# Altium PCB PCB v0.1.PcbDoc
Units mm, origin at the board's own origin, x right, y up, seen from the top; angles counter-clockwise.
Board outline 12.97 x 23.85 mm, 8 copper layers (Top, GND Top, Signal 1, Signal 2/GND, Power, Signal 3, GND Bottom, Bottom), stack 1.211 mm thick; 53 components, 44 nets, 246 pads, 133 vias.
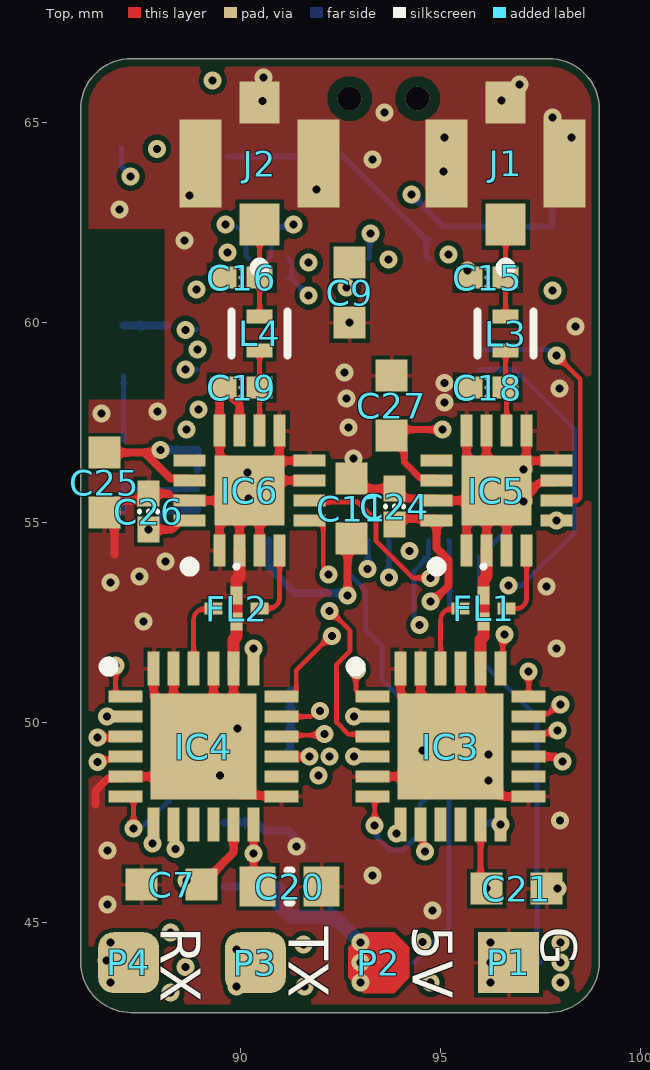
[diagram p0: Top view]
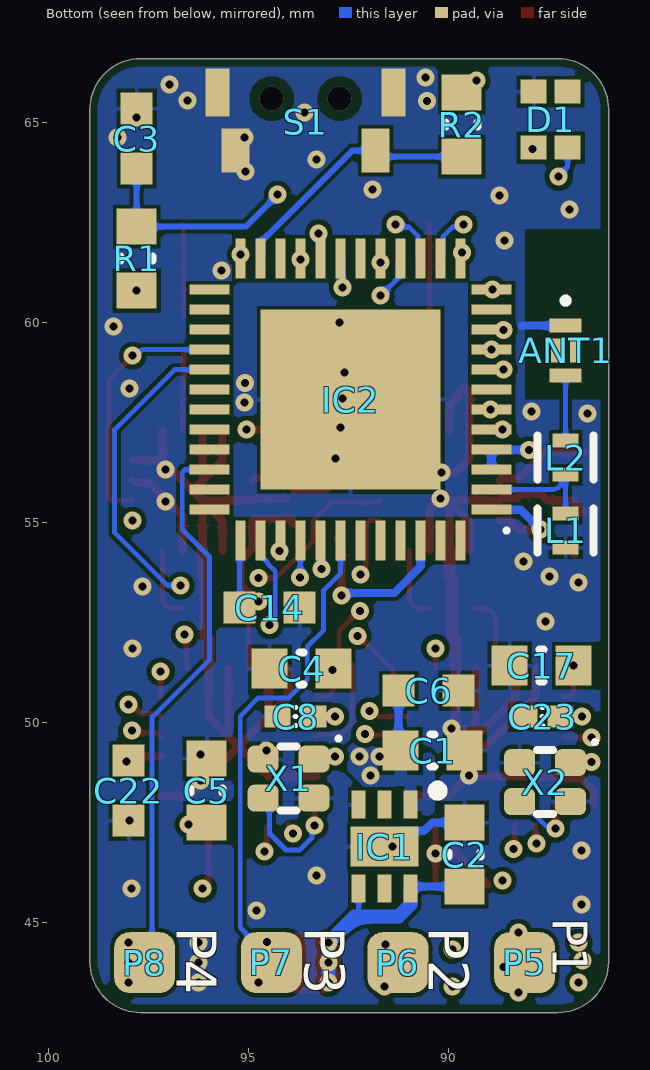
[diagram p1: Bottom view, seen from below]
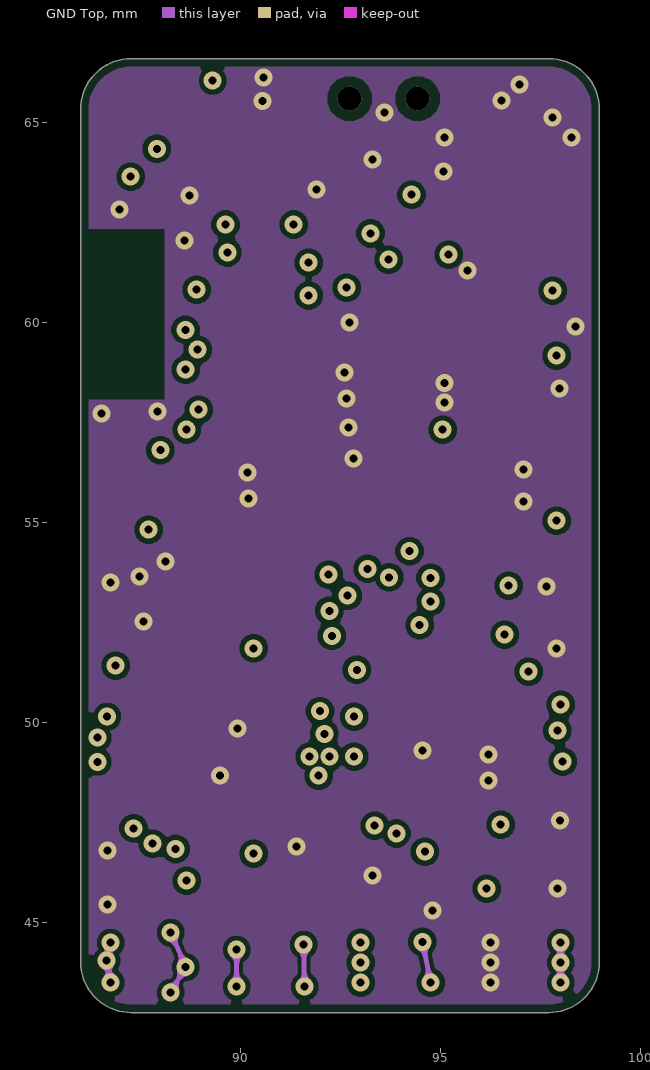
[diagram p2: GND Top]
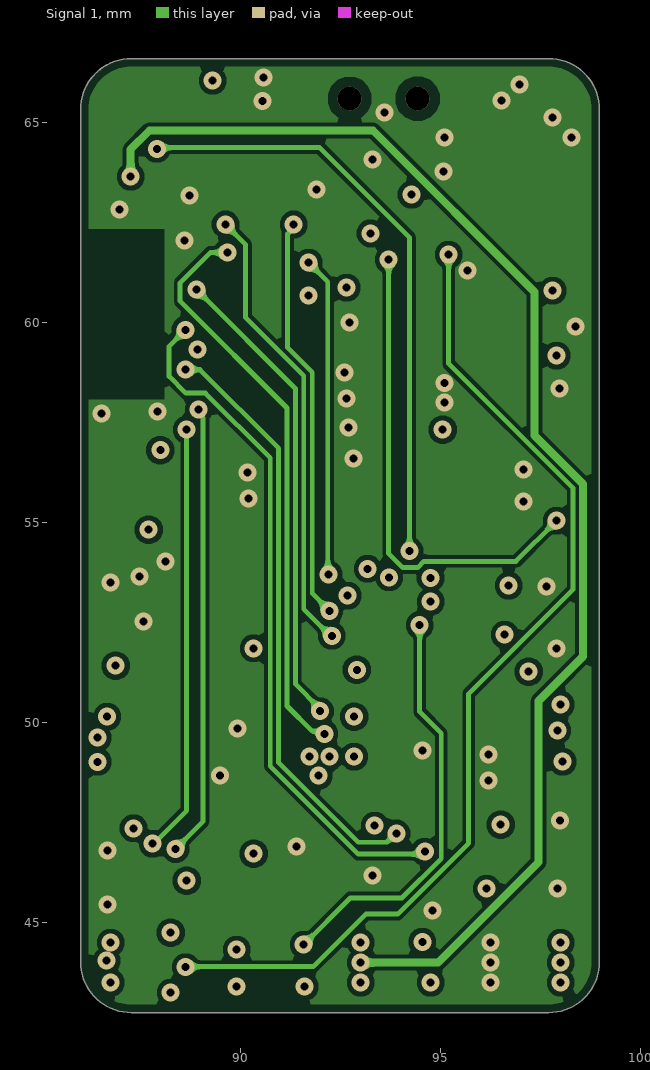
[diagram p3: Signal 1]
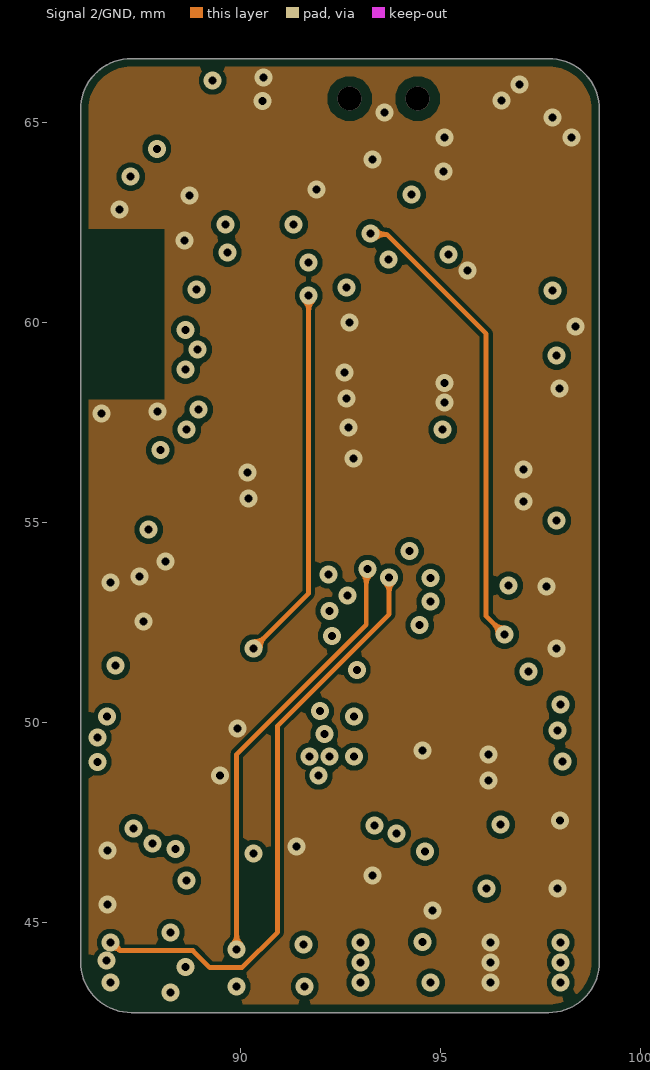
[diagram p4: Signal 2/GND]
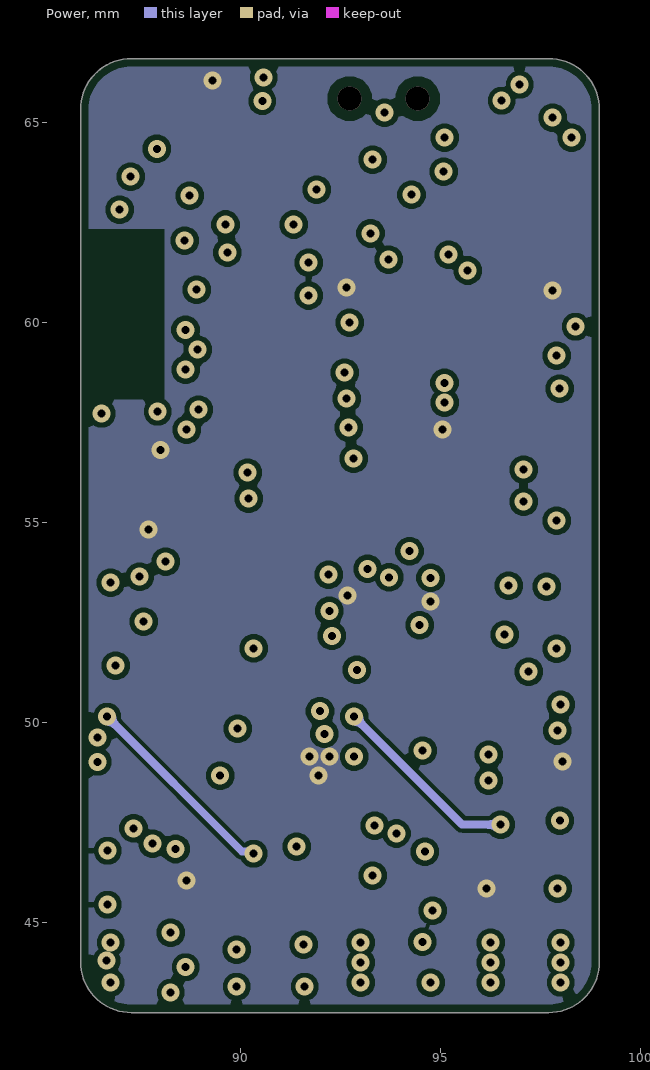
[diagram p5: Power]
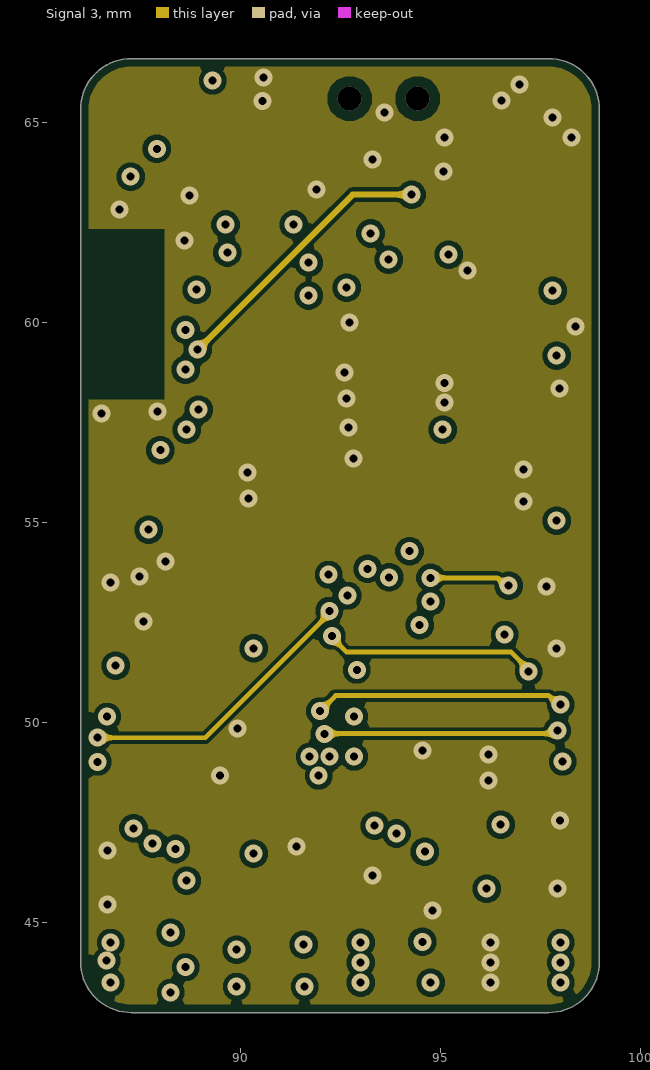
[diagram p6: Signal 3]
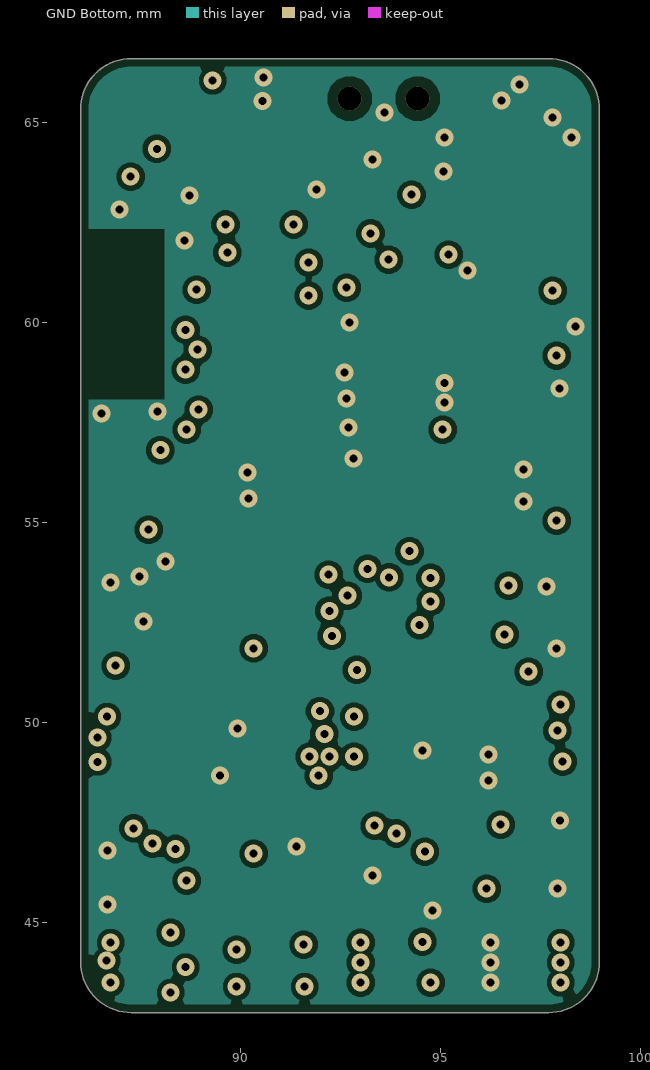
[diagram p7: GND Bottom]
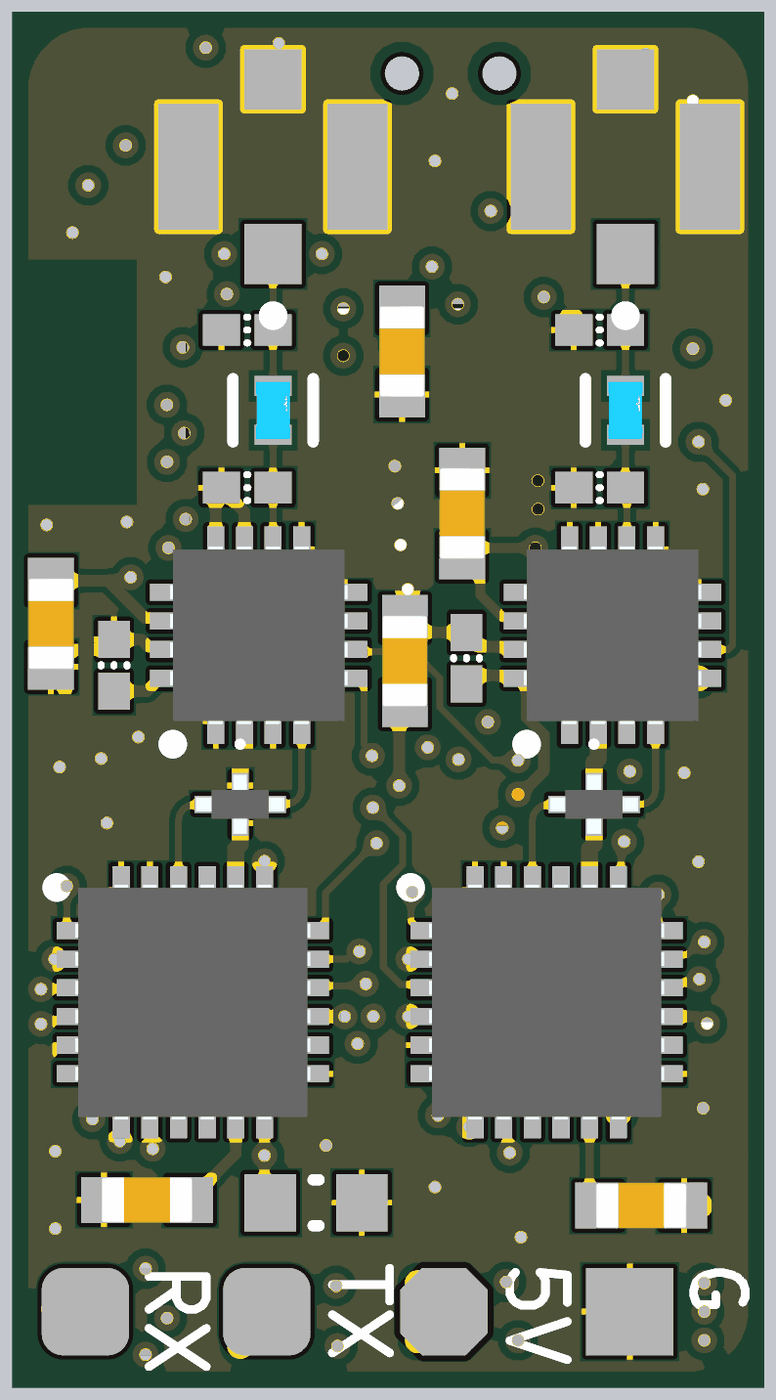
[diagram p8: 3D render of the assembled board from above, using the file's embedded part models]
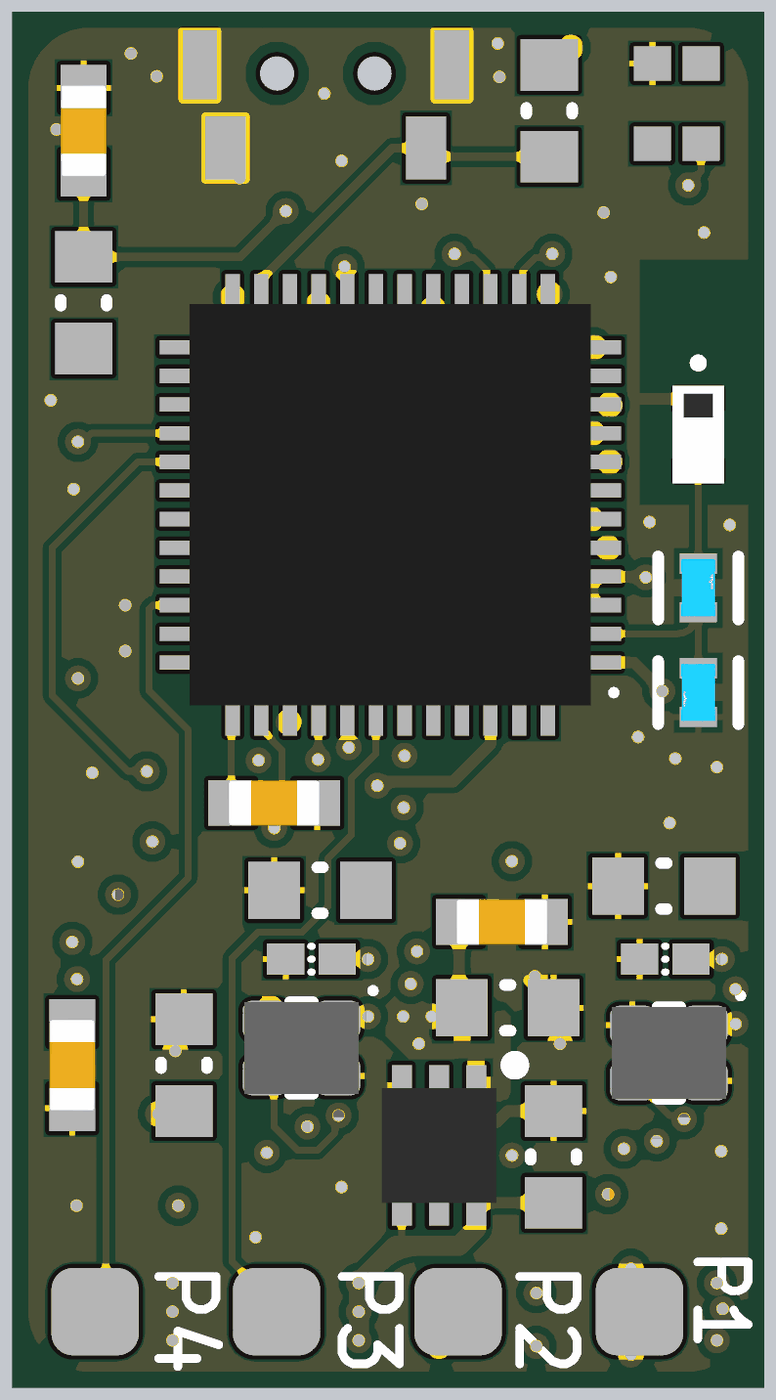
[diagram p9: 3D render of the assembled board from below, using the file's embedded part models]

## Layer stack, top to bottom
Top Solder: solder mask 0.0127, Solder Resist, Dk 3.8
Top: signal copper 0.035
Dielectric 1: prepreg 0.0711, PP-006, Dk 4.1
GND Top: signal copper 0.0175
Core 1: core 0.2032, FR-4, Dk 4.6
Signal 1: signal copper 0.0175
Dielectric 2: prepreg 0.0711, PP-006, Dk 4.1
Dielectric 3: prepreg 0.0711, PP-006, Dk 4.1
Signal 2/GND: signal copper 0.0175
Core 2: core 0.2032, FR-4, Dk 4.6
Power: signal copper 0.0175
Dielectric 4: prepreg 0.0711, PP-006, Dk 4.1
Dielectric 5: prepreg 0.0711, PP-006, Dk 4.1
Signal 3: signal copper 0.0175
Core 3: core 0.2032, FR-4, Dk 4.6
GND Bottom: signal copper 0.0175
Dielectric 6: prepreg 0.0711, PP-006, Dk 4.1
Bottom: signal copper 0.035
Bottom Solder: solder mask 0.0127, Solder Resist, Dk 3.8

## Board outline
86,44.02 86,65.33 cw(c87.27,65.33) 87.27,66.6 97.7,66.6 cw(c97.7,65.33) 98.97,65.33 98.97,44.02 cw(c97.7,44.02) 97.7,42.75 87.27,42.75 cw(c87.27,44.02)

## Design rules (kind name [scope] priority, off if disabled: settings)
BoardOutlineClearance [All] p1: gap=0.2 ignorepadtopadclearanceinfootprint=FALSE
Clearance [All] p1: gap=0.102 ignorepadtopadclearanceinfootprint=FALSE except(0.09: Arc-Arc Arc-Track Track-Track; 0.127: Arc-SMDPad Arc-Via Track-SMDPad Track-Via SMDPad-SMDPad SMDPad-Via THPad-Via Via-Via Via-Fill Via-Poly Via-Region Via-Text; 0.25: Arc-Hole Track-Hole SMDPad-Hole THPad-Hole Via-Hole Fill-Hole Poly-Hole Region-Hole Text-Hole)
ComponentClearance [All] p1: gap=0.102 collisioncheckmode=3 verticalgap=0.102 showdistances=TRUE
DiffPairsRouting [All] p1: maxlimit=0.102 minlimit=0.102 mostfreqgap=0.102 toplayer_minwidth=0.09 toplayer_maxwidth=1816.048 toplayer_prefwidth=0.102 midlayer1_minwidth=0.09 midlayer1_maxwidth=1816.048 midlayer1_prefwidth=0.102 midlayer2_minwidth=0.09 midlayer2_maxwidth=1816.048 midlayer2_prefwidth=0.102 midlayer3_minwidth=0.09 midlayer3_maxwidth=1816.048 midlayer3_prefwidth=0.102 midlayer4_minwidth=0.09 midlayer4_maxwidth=1816.048 midlayer4_prefwidth=0.102 midlayer5_minwidth=0.09 midlayer5_maxwidth=1816.048 midlayer5_prefwidth=0.102 midlayer6_minwidth=0.09 midlayer6_maxwidth=1816.048 midlayer6_prefwidth=0.102 bottomlayer_minwidth=0.09 bottomlayer_maxwidth=1816.048 bottomlayer_prefwidth=0.102 maxuncoupledlength=12.7
Height [All] p1: minheight=0 maxheight=1816.048 prefheight=12.7
HoleSize [All] p1: absolutevalues=TRUE maxlimit=6.3 minlimit=0.2 maxpercent=80.000 minpercent=20.000
HoleToHoleClearance [All] p1: gap=0.25 allowstackedmicrovias=FALSE
MinimumAnnularRing [All] p1: minimumring=0.1
MinimumSolderMaskSliver [All] p1: minsoldermaskwidth=0
PlaneClearance [All] p1: clearance=0.102
PlaneConnect PlaneConnectPowerPads [InPadClass('PowerPads')] p1: planeconnectstyle=Direct reliefexpansion=0.508 reliefentries=4 reliefconductorwidth=0.254 reliefairgap=0.254
PlaneConnect [All] p2: pad.planeconnectstyle=Relief pad.reliefexpansion=0.3 pad.reliefentries=4 pad.reliefconductorwidth=0.102 pad.reliefairgap=0.102 via.planeconnectstyle=Direct via.reliefexpansion=0.3 via.reliefentries=4 via.reliefconductorwidth=0.127 via.reliefairgap=0.127
PolygonConnect PolygonConnectPowerPads [All vs (InPadClass('PowerPads'))] p1: connectstyle=Direct reliefconductorwidth=0.254 reliefentries=4 polygonreliefangle="90 Angle" airgapwidth=0.254
PolygonConnect [All] p2: thpad.connectstyle=Relief thpad.reliefconductorwidth=0.102 thpad.reliefentries=4 thpad.polygonreliefangle="90 Angle" thpad.airgapwidth=0.102 smdpad.connectstyle=Relief smdpad.reliefconductorwidth=0.102 smdpad.reliefentries=4 smdpad.polygonreliefangle="90 Angle" smdpad.airgapwidth=0.102 via.connectstyle=Direct via.reliefconductorwidth=0.127 via.reliefentries=4 via.polygonreliefangle="90 Angle" via.airgapwidth=0.127
RoutingVias [All] p1: holewidth=0.2 width=0.45 viastyle="Through Hole" minholewidth=0.2 minwidth=0.42 maxholewidth=6.3 maxwidth=6.55
SilkToSilkClearance [All] p1: silktosilkclearance=0
SilkToSolderMaskClearance [IsPad] p1: minsilkscreentomaskgap=0 clearancetoexposedcopper=TRUE
SolderMaskExpansion [IsVia] p1: expansion=0.075 istentingtop=TRUE
SolderMaskExpansion SolderMaskExpansion_default [All] p2: expansion=0.075 istentingtop=FALSE
Width [All] p1: maxlimit=1816.048 minlimit=0.09 preferedwidth=0.11 minimp=50.000000 maximp=50.000000 favimp=50.000000
20 further rules are at their usual default settings.

## Classes and differential pairs
component class Power: C1 C2 IC1 P1 P2
component class "ELRS Logic": ANT1 C3 C4 C5 C6 C7 C8 C9 C11 C14 C15 C16 C17 C18 C19 C20 C21 C22 C23 C24 C25 C26 C27 D1 FL1 FL2 IC2 IC3 IC4 IC5 IC6 J1 J2 L1 L2 L3 L4 P3 P4 P5 P6 P7 P8 R1 R2 S1 X1 X2

## Components (designator, comment, footprint, x,y, rotation, side; value= is the part's Value field where it differs from the comment)
ANT1 "ANT016008LCS2442MA2" ANT016008LCS2442MA2 87.075,59.3 r270 bottom
C1 "1µ" CAPC0603(1608)55_N 90.4,49.3 r0 bottom
C2 "1µ" CAPC0603(1608)55_N 89.6,46.7 r270 bottom
C3 "100nF" WCAP-CSGP_0603_L1.6W0.8H0.8_Reflow 97.8,64.6 r90 bottom
C4 "10n" CAPC0603(1608)55_N 93.675,51.35 r180 bottom
C5 "10n" CAPC0603(1608)55_N 96.05,48.3 r270 bottom
C6 "100nF" WCAP-CSGP_0603_L1.6W0.8H0.8_Reflow 90.5,50.8 r0 bottom
C7 "100nF" WCAP-CSGP_0603_L1.6W0.8H0.8_Reflow 88.275,45.95 r0 top
C8 "470nF" "0402 cap" 93.825,50.15 r180 bottom
C9 "100nF" WCAP-CSGP_0603_L1.6W0.8H0.8_Reflow 92.725,60.75 r90 top
C11 "100nF" WCAP-CSGP_0603_L1.6W0.8H0.8_Reflow 92.775,55.35 r270 top
C14 "10µF" WCAP-CSGP_0603_L1.6W0.8H0.8_Reflow 94.475,52.875 r0 bottom
C15 "1.5pF" "0402 cap" 96.175,61.125 r180 top
C16 "1.5pF" "0402 cap" 90.025,61.125 r180 top
C17 "10n" CAPC0603(1608)55_N 87.675,51.425 r180 bottom
C18 "1.5pF" "0402 cap" 96.175,58.375 r180 top
C19 "1.5pF" "0402 cap" 90.025,58.375 r180 top
C20 "10n" CAPC0603(1608)55_N 91.225,45.9 r180 top
C21 "100nF" WCAP-CSGP_0603_L1.6W0.8H0.8_Reflow 96.9,45.85 r180 top
C22 "100nF" WCAP-CSGP_0603_L1.6W0.8H0.8_Reflow 98,48.3 r90 bottom
C23 "470nF" "0402 cap" 87.65,50.15 r180 bottom
C24 "10p" "0402 cap" 93.85,55.4 r270 top
C25 "100nF" WCAP-CSGP_0603_L1.6W0.8H0.8_Reflow 86.6,56 r90 top
C26 "10p" "0402 cap" 87.7,55.275 r270 top
C27 "100nF" WCAP-CSGP_0603_L1.6W0.8H0.8_Reflow 93.775,57.925 r270 top
D1 "WS2812B_1615" WS2812B_1615 87.45,65.075 r270 bottom
FL1 "LFL152G45TC1A219" LFL152G45TC1A219 96.075,52.85 r0 top
FL2 "LFL152G45TC1A219" LFL152G45TC1A219 89.9,52.85 r0 top
IC1 "TPS74633PQWDRVRQ1" SON65P200X200X80-7N 91.6,46.9 r270 bottom
IC2 "ESP32-PICO-V3" ESP32PICOV3 92.45,58.075 r0 bottom
IC3 "SX1281IMLTRT" QFN50P400X400X100-25N-D 95.25,49.4 r0 top
IC4 "SX1281IMLTRT" QFN50P400X400X100-25N-D 89.075,49.4 r0 top
IC5 "RFX2401C" QFN50P300X300X60-17N-D 96.4,55.8 r90 top
IC6 "RFX2401C" QFN50P300X300X60-17N-D 90.225,55.8 r90 top
J1 "A-1JB" AMPH-A-1JB_V 96.625,63.975 r90 top
J2 "A-1JB" AMPH-A-1JB_V 90.475,63.975 r90 top
L1 "3.3nH" FP-LQW15AN_00-W0_6-0_1-MFG 87.075,54.8 r270 bottom
L2 "2nH" FP-LQW15AN_00-W0_6-0_1-MFG 87.075,56.625 r90 bottom
L3 "3.3nH" FP-LQW15AN_00-W0_6-0_1-MFG 96.625,59.725 r90 top
L4 "3.3nH" FP-LQW15AN_00-W0_6-0_1-MFG 90.475,59.725 r90 top
P1 "solder pad square single sided" "solder pad single sided square" 96.7,44 r0 top
P2 "solder pad chamfered single sided" "solder pad single sided chamfered" 93.458,44 r0 top
P3 "solder pad rounded single sided" "solder pad single sided rounded" 90.367,44 r0 top
P4 "solder pad rounded single sided" "solder pad single sided rounded" 87.2,44 r0 top
P5 "solder pad rounded single sided" "solder pad single sided rounded" 88.1,44 r180 bottom
P6 "solder pad rounded single sided" "solder pad single sided rounded" 91.267,44 r180 bottom
P7 "solder pad rounded single sided" "solder pad single sided rounded" 94.433,44 r180 bottom
P8 "solder pad rounded single sided" "solder pad single sided rounded" 97.6,44 r180 bottom
R1 "1K" RESC0603(1608)_N 97.8,61.6 r270 bottom
R2 "10K" RESC0603(1608)_N 89.675,64.95 r90 bottom
S1 "Tactile Switch" "Tactile Switch" 93.575,64.3 r0 bottom
X1 "52MHz Crystal" "2016 Crystal" 94,48.6 r0 bottom
X2 "52MHz Crystal" "2016 Crystal" 87.587,48.513 r0 bottom

## Footprints (in the part's own frame and the unit in brackets; to place one, negate y for a bottom-side part, rotate by r counter-clockwise, add the part's x,y. Pads: shape width x height; smd on the part's side, far side on the other; paste and mask are expansions set on the pad)
"0402 cap" [mm]
  rect 0.65x0.55 smd: 1(-0.45,0) 2(0.45,0)
  silkscreen extent -0.01,-0.23 0.01,0.23, body extent -0.5,-0.25 0.5,0.25, height 0.35
"2016 Crystal" [mm]
  rrect50% 0.775x0.675 smd: 1(-0.637,-0.487) 2(0.637,-0.487) 3(0.637,0.487) 4(-0.637,0.487)
  silkscreen extent -1.3,-1.05 0.2,0.8, body extent -1,-0.8 1,0.8, height 0.99
AMPH-A-1JB_V [mm] "SMD, 4-Leads, Body 2.6x2.6mm"
  rect 1.05x1 smd: 1(-1.525,0) 3(1.525,0)
  rect 2.2x1.05 smd: 2(0,-1.475) 4(0,1.475)
  silkscreen extent -2.72,-0.13 -2.48,0.12, body extent -1.3,-1.3 1.3,1.3, height 1.35
ANT016008LCS2442MA2 [mm]
  rect 0.35x0.8 smd: 1(-0.625,0) 4(0.625,0)
  rect 0.6x0.26 smd: 2(0,-0.235) 6(0,0.235)
  silkscreen extent -1.3,-0.05 -1.2,0.05, body extent -0.85,-0.45 0.85,0.45, height 0.4
CAPC0603(1608)55_N [mm] "Chip Capacitor, Body 1.6x0.8mm, Height 0.55mm, IPC Medium Density"
  rect 0.9x1 smd: 1(-0.8,0) 2(0.8,0)
  silkscreen extent -0.05,-0.4 0.05,0.4, body extent -0.87,-0.48 0.88,0.47, height 0.55
ESP32PICOV3 [mm]
  rect 1x0.25 smd: 1(-3.525,2.75) 2(-3.525,2.25) 3(-3.525,1.75) 4(-3.525,1.25) 5(-3.525,0.75) 6(-3.525,0.25) 7(-3.525,-0.25) 8(-3.525,-0.75) 9(-3.525,-1.25) 10(-3.525,-1.75) 11(-3.525,-2.25) 12(-3.525,-2.75) 25(3.525,-2.75) 26(3.525,-2.25) 27(3.525,-1.75) 28(3.525,-1.25) 29(3.525,-0.75) 30(3.525,-0.25) 31(3.525,0.25) 32(3.525,0.75) 33(3.525,1.25) 34(3.525,1.75) 35(3.525,2.25) 36(3.525,2.75)
  rect 0.25x1 smd: 13(-2.75,-3.525) 14(-2.25,-3.525) 15(-1.75,-3.525) 16(-1.25,-3.525) 17(-0.75,-3.525) 18(-0.25,-3.525) 19(0.25,-3.525) 20(0.75,-3.525) 21(1.25,-3.525) 22(1.75,-3.525) 23(2.25,-3.525) 24(2.75,-3.525) 37(2.75,3.525) 38(2.25,3.525) 39(1.75,3.525) 40(1.25,3.525) 41(0.75,3.525) 42(0.25,3.525) 43(-0.25,3.525) 44(-0.75,3.525) 45(-1.25,3.525) 46(-1.75,3.525) 47(-2.25,3.525) 48(-2.75,3.525)
  rect 4.5x4.5 smd: 49(0,0)
  silkscreen extent -3.95,3.22 -3.85,3.32, body extent -3.5,-3.5 3.5,3.5, height 0.94
FP-LQW15AN_00-W0_6-0_1-MFG [mm]
  rect 0.35x0.65 smd paste+0 mask+0: 1(-0.425,0) 2(0.425,0)
  silkscreen extent -0.55,-0.7 0.55,0.7, body extent -0.5,-0.3 0.5,0.3, height 0.6
LFL152G45TC1A219 [mm]
  rect 0.3x0.45 smd: 1(0,0.325) 3(0,-0.325)
  rect 0.45x0.3 smd: 2(0.575,0) 4(-0.575,0)
  silkscreen extent -0.05,1 0.05,1.1, body extent -0.77,-0.52 0.77,0.52, height 0.5
QFN50P300X300X60-17N-D [mm]
  rect 0.8x0.3 smd: 1(-1.5,0.75) 2(-1.5,0.25) 3(-1.5,-0.25) 4(-1.5,-0.75) 9(1.5,-0.75) 10(1.5,-0.25) 11(1.5,0.25) 12(1.5,0.75)
  rect 0.3x0.8 smd: 5(-0.75,-1.5) 6(-0.25,-1.5) 7(0.25,-1.5) 8(0.75,-1.5) 13(0.75,1.5) 14(0.25,1.5) 15(-0.25,1.5) 16(-0.75,1.5)
  rect 1.75x1.75 smd: 17(0,0)
  silkscreen extent -2.02,1.37 -1.78,1.62, body extent -1.55,-1.55 1.55,1.55, height 0.6
QFN50P400X400X100-25N-D [mm]
  rect 0.85x0.3 smd: 1(-1.95,1.25) 2(-1.95,0.75) 3(-1.95,0.25) 4(-1.95,-0.25) 5(-1.95,-0.75) 6(-1.95,-1.25) 13(1.95,-1.25) 14(1.95,-0.75) 15(1.95,-0.25) 16(1.95,0.25) 17(1.95,0.75) 18(1.95,1.25)
  rect 0.3x0.85 smd: 7(-1.25,-1.95) 8(-0.75,-1.95) 9(-0.25,-1.95) 10(0.25,-1.95) 11(0.75,-1.95) 12(1.25,-1.95) 19(1.25,1.95) 20(0.75,1.95) 21(0.25,1.95) 22(-0.25,1.95) 23(-0.75,1.95) 24(-1.25,1.95)
  rect 2.65x2.65 smd: 25(0,0)
  silkscreen extent -2.5,1.88 -2.25,2.12, body extent -2.05,-2.05 2.05,2.05, height 1
RESC0603(1608)_N [mm] "Chip Resistor, Body 1.6x0.8mm, IPC Medium Density"
  rect 0.9x1 smd: 1(-0.8,0) 2(0.8,0)
  silkscreen extent -0.05,-0.4 0.05,0.4, body extent -0.85,-0.47 0.85,0.47, height 0.6
"solder pad single sided chamfered" [mil]
  oct 1x1 smd: 1(0,0)
  Top region: -15,-30 -30,-15 -30,15 -15,30 15,30 30,15 30,-15 15,-30
"solder pad single sided rounded" [mil]
  rrect50% 60x60 smd: 1(0,0)
"solder pad single sided square" [mil]
  rect 60x60 smd: 1(0,0)
SON65P200X200X80-7N [mm]
  rect 0.7x0.35 smd: 1(-1.05,0.65) 2(-1.05,0) 3(-1.05,-0.65) 4(1.05,-0.65) 5(1.05,0) 6(1.05,0.65)
  rect 1x1.7 smd: 7(0,0)
  silkscreen extent -1.52,1.2 -1.28,1.45, body extent -1,-1 1,1, height 0.77
"Tactile Switch" [mm]
  rect 0.7x1.1 smd: 1(-1.75,0) 2(1.75,0)
  rect 0.6x1.2 smd: 3(-2.2,-1.45) 4(2.2,-1.45)
  round 0.6 hole 0.6 unplated: ""(-0.85,-1.3) ""(0.85,-1.3)
WCAP-CSGP_0603_L1.6W0.8H0.8_Reflow [mm] "Ceramic Capacitors, body 1.6x0.8mm"
  rect 0.8x0.8 smd: 1(-0.75,0) 2(0.75,0)
  body extent -0.8,-0.4 0.8,0.4, height 0.8
WS2812B_1615 [mm]
  rect 0.6x0.65 smd: 1(-0.7,0.425) 2(0.7,0.425) 3(-0.7,-0.425) 4(0.7,-0.425)
  body extent -0.8,-0.75 0.8,0.75, height 0.6

## Part data
ANT1: "Antenna", Manufacturer_Name=TDK, Mouser Part Number=810-ANT168LCS2442MA2, Arrow Part Number=ANT016008LCS2442MA2, Arrow Price/Stock=https://www.arrow.com/en/products/ant016008lcs2442ma2/tdk, Datasheet Link=https://product.tdk.com/system/files/dam/doc/product/rf/rf/antenna/catalog/rf_ant_ant016008lcs2442ma2_summary_en.pdf, Height=0.4mm, Manufacturer_Part_Number=ANT016008LCS2442MA2, Mouser Price/Stock=https://www.mouser.co.uk/ProductDetail/TDK/ANT016008LCS2442MA2?qs=NlTBjZZh8j0h3jcBIFCiDg%3D%3D
C1 C2: library part "Cap 1µ", "Keramikvielschichtkondensator, SMD, Baureihe MC, ± 20%", Manufacturer=Multicomp, OC_FARNELL=1759409, PackageReference=0603
C3 C6 C7 C9 C11 C21 C22 C25 C27: library part 885012206095, "WCAP-CSGP Multilayer Ceramic Chip Capacitor, General Purpose, size 0603, X7R, 100nF, 50VDC", Capacitance Tolerance=+/-10%, Case/Size Code=0603, Insulation Resistance=5GΩ, Manufacturer="Wurth Elektronik", Operating Temperature Max=125°C, Operating Temperature Min=-55°C, Rated Voltage (DC)=50V, Capacitance=100nF, Category="Multilayer Ceramic Chip Capacitors", Ceramic Type=X7R, ComponentLink1Description="Website Link", ComponentLink1URL=https://www.we-online.com/redexpert/article/885012206095?ad, ComponentLink2Description="Datasheet Link", ComponentLink2URL=https://www.we-online.com/redexpert/spec/885012206095?ad, Dissipation Factor=3%, Height=0.8mm, Length=1.6mm, Manufacturer Part Number=885012206095, Match Code=WCAP-CSGP, Mount="Surface Mount", Packaging="Tape and Reel", Technical Reference=X7R0603104K050DFCT10000, Width=0.8mm
C4 C5 C17 C20: library part "Cap 10n", "Keramikvielschichtkondensator, SMD, Baureihe MC, ± 20%", Manufacturer=Multicomp, OC_FARNELL=1759022, PackageReference=0603
C8 C23 C24 C26: library part "Capacitor 0402 100nF"
C14: library part 885012106031, "WCAP-CSGP Multilayer Ceramic Chip Capacitor, General Purpose, size 0603, X5R, 10µF, 25VDC", Capacitance Tolerance=+/20%, Case/Size Code=0603, Insulation Resistance=0.01GΩ, Manufacturer="Wurth Elektronik", Operating Temperature Max=85°C, Operating Temperature Min=-55°C, Rated Voltage (DC)=25V, Capacitance=10µF, Category="Multilayer Ceramic Chip Capacitors", Ceramic Type=X5R, ComponentLink1Description="Website Link", ComponentLink1URL=https://www.we-online.com/redexpert/article/885012106031?ad, ComponentLink2Description="Datasheet Link", ComponentLink2URL=https://www.we-online.com/redexpert/spec/885012106031?ad, Dissipation Factor=20%, Height=0.8mm, Length=1.6mm, Manufacturer Part Number=885012106031, Match Code=WCAP-CSGP, Mount="Surface Mount", Packaging="Tape and Reel", Technical Reference=X5R0603106M025DFCT10000, Width=0.8mm
C15 C16 C18 C19: library part "Capacitor 0402 100nF", "CL05C1R5BB5NNNC"
D1: "XINGLIGHT XL-1615RGBC-WS2812B"
FL1 FL2: "Filter", Manufacturer_Name="Murata Electronics", Mouser Part Number=81-LFL152G45TC1A219, Arrow Part Number=LFL152G45TC1A219, Arrow Price/Stock=https://www.arrow.com/en/products/lfl152g45tc1a219/murata-manufacturing?region=nac, Datasheet Link=https://www.murata.com/en-us/products/productdetail?partno=LFL152G45TC1A219, Height=0.4mm, Manufacturer_Part_Number=LFL152G45TC1A219, Mouser Price/Stock=https://www.mouser.co.uk/ProductDetail/Murata-Electronics/LFL152G45TC1A219?qs=%2F%252BYoplLUB5hWhU%2FZs0btqg%3D%3D
IC1: "Integrated Circuit", Manufacturer_Name="Texas Instruments", Mouser Part Number=595-PS74633PQWDRVRQ1, Arrow Part Number=TPS74633PQWDRVRQ1, Arrow Price/Stock=https://www.arrow.com/en/products/tps74633pqwdrvrq1/texas-instruments, Datasheet Link=https://www.ti.com/lit/gpn/TPS746-Q1, Height=0.8mm, Manufacturer_Part_Number=TPS74633PQWDRVRQ1, Mouser Price/Stock=https://www.mouser.co.uk/ProductDetail/Texas-Instruments/TPS74633PQWDRVRQ1?qs=%252B6g0mu59x7LGnDdkB7pJpA%3D%3D
IC2: "Integrated Circuit", Manufacturer_Name="Espressif Systems", Mouser Part Number=356-ESP32-PICO-V3, Datasheet Link=https://kr.mouser.com/datasheet/2/891/esp32-pico-v3_datasheet_en-1842685.pdf, Height=1.04mm, Manufacturer_Part_Number=ESP32-PICO-V3, Mouser Price/Stock=https://www.mouser.co.uk/ProductDetail/Espressif-Systems/ESP32-PICO-V3?qs=GBLSl2Akirs311o8knsnZA%3D%3D
IC3 IC4: "Integrated Circuit", Manufacturer_Name=SEMTECH, Mouser Part Number=947-SX1281IMLTRT, Arrow Part Number=SX1281IMLTRT, Arrow Price/Stock=https://www.arrow.com/en/products/sx1281imltrt/semtech?region=nac, Datasheet Link=https://www.arrow.com/en/products/sx1281imltrt/semtech, Height=1mm, Manufacturer_Part_Number=SX1281IMLTRT, Mouser Price/Stock=https://www.mouser.co.uk/ProductDetail/Semtech/SX1281IMLTRT?qs=5aG0NVq1C4xR1aFoShVcjg%3D%3D
IC5 IC6: "Integrated Circuit", Manufacturer_Name=Skyworks, Mouser Part Number=477-RFX2401C, Datasheet Link=https://eu.mouser.com/datasheet/2/472/RFX2401C_204359B-1524606.pdf, Height=0.6mm, Manufacturer_Part_Number=RFX2401C, Mouser Price/Stock=https://www.mouser.co.uk/ProductDetail/Skyworks-Solutions-Inc/RFX2401C?qs=dBWc1juS%252B3ydEXrKsuxQ7A%3D%3D
J1 J2: library part CMP-1743-00001-1, "AMC PCB Jack, 0 to 60 GHz, 60 V, -40 to 90 degC, 4-Pin SMD, RoHS, Tape and Reel", Capacitance="100 uF", Case Code (Imperial)=2917, Case Code (Metric)=7343, Max Operating Temperature="125 degC", Min Operating Temperature="-55 degC", Package Quantity=1, Tolerance=10%, Voltage Rating="10 V", Case\Package=2917, ComponentLink1Description=Datasheet, ComponentLink1URL=http://drawings.amphenolrf.com/Customer_Outline/CA-1JB.pdf, DatasheetVersion="Rev. K, 05/2016", ESR="700 mohm", Height="3.1 mm", Length="7.3 mm", Mount="Surface Mount", PackageDescription="4-Pin Surface Mount Device, Body 2.6 x 2.6 mm", PackageReference=A-1JB, Packaging="Tape and Reel", Pins=2, Radiation Hardening=No, REACH SVHC="No SVHC", RoHSCompliant=true, Voltage Rating (DC)="10 V", Weight="0.023634 oz", Width="4.3 mm"
L1 L2 L3 L4: library part CMP-06042-000827-1, "MLG1005S3N3BT000", Case Code (Imperial)=0402, Case Code (Metric)=1005, Current=750mA, DC Resistance (DCR)=70mR, Inductance=3.9nH, Max Operating Temperature=125°C, Min Operating Temperature=-55°C, Package Quantity=10000, Self Resonant Frequency=10GHz, Test Frequency=100MHz, Case/Package=0402, Core Material=Air, Current Rating=750mA, DC Current=750mA, Depth=0.7mm, Height=0.5mm, Lead Free="Lead Free", Length=1mm, Max DC Current=750mA, Military Standard=Not, Mount="Surface Mount", Number of Pins=2, Packaging="Tape and Reel", Radiation Hardening=No, REACH SVHC="No SVHC", Shielding=Unshielded, Termination=SMD/SMT, Weight=2.8E-05oz, Width=0.02inch
R1: library part "Res 1K", "Chipwiderstand, SMD, Baureihe MC, 1%", Manufacturer=Multicomp, OC_FARNELL=9330380, PackageReference=0603
R2: library part "Res 10K", "Chipwiderstand, SMD, Baureihe MC, 1%", Manufacturer=Multicomp, OC_FARNELL=9330399, PackageReference=0603
X1 X2: library part "HCI XC21M4-52.000", "HCI XC21M4-52.000-F10NNHPL"

## Via types
v1: diameter 0.45, hole 0.2, Top to Bottom, tented both sides, 133 vias

## Nets (pads, with @x,y where several pads share a name; then routed paths per layer and width w, separated by ;. In a path a pad name is that pad's centre, name@x,y a point inside that pad or via, vN(x,y) a via of type N, cw(c..) or ccw(c..) an arc to the next point about the centre after c; other vN are vias at no path point)
3V3: C1.2 C6.2 C7.2 C9.2 C11.2 C14.2 C21.2 C22.2 C24.2 C25.2 C26.2 C27.2 IC1.1 IC2.1 IC2.3 IC2.4 IC2.19 IC2.37 IC2.46 IC3.11 IC3.15 IC4.11 IC4.15 IC5.14 IC5.16 IC6.14 IC6.16 R1.2 R2.2 | length 26.9
  Top w0.15: IC3.11 96,46 v1(96.15,45.85)
  Top w0.17: IC5.14 94.835,56.115 94.485,56.115 94.09,56.51 94.09,56.86 C27.2 93.925,57.325 v1(95.052,57.325)
  Top w0.2: C25.2 87.596,56.75 ; v1(87.7,54.825) 88.275,54.825 88.425,54.975 88.425,55 88.475,55.05 IC6.16 ; v1(87.991,56.811) 87.943,56.763 87.61,56.763 87.596,56.75 ; IC6.14 88.675,56.1 88.246,56.1 87.596,56.75 ; C7.2 89.825,46.75 IC4.11 ; IC4.15 v1(91.725,49.15) ; v1(92.676,53.176) 92.676,54.501 C11.2 ; C24.2 C24.2@93.95,55.05 ; C24.2@93.9,55.1 IC5.16@94.85,55.1 ; v1(94.75,53.025) 94.794,53.025 95.201,53.431 95.201,54.065 94.9,54.366 IC5.16 ; IC3.15 97.857,49.15 97.982,49.025 v1(98.05,49.025)
  Bottom w0.12: IC2.37 cw(c95.2,54.525) 95.225,54.525 C14.2
  Bottom w0.2: v1(87.7,54.825) 88.2,55.325 IC2.1 ; v1(87.991,56.811) 87.998,56.818 88.918,56.818 IC2.4 IC2.3 ; IC2.46 90.7,53.9 91.354,53.246 92.539,53.246 92.608,53.176 v1(92.676,53.176) ; C1.2 91.25,49.35 C6.2 ; v1(92.65,60.875) 92.675,60.9 92.675,61.575 IC2.19
  other v1: 88.65,46.05 91.95,48.675 92.225,49.15 97.8,60.8 89.3,66.05
5V: C2.2 D1.2 IC1.4 IC1.6 P2.1 | length 40.1
  Signal 1 w0.2: v1(87.25,63.65) 87.25,64.333 87.716,64.799 93.314,64.799 97.348,60.764 97.348,57.181 98.562,55.967 98.562,51.651 97.45,50.539 97.45,46.51 94.939,44 v1(93,44)
  Bottom w0.12: D1.2 87.025,63.895 87.25,63.67 v1(87.25,63.65) ; IC1.4 92.25,45.25 92.352,45.148
  Bottom w0.2: C2.2 90.9,45.9 IC1.6
  Bottom w0.35: IC1.6 90.95,45.455 91.257,45.148 92.352,45.148 v1(93,44.5) v1(93,44) v1(93,43.5)
BUSY: IC2.5 IC4.7 | length 11.2
  Top w0.12: v1(87.8,46.975) 87.825,47 IC4.7
  Signal 1 w0.12: v1(87.8,46.975) 87.826,46.975 88.65,47.799 v1(88.65,57.325)
BUSY_2: IC2.8 IC3.7 | length 15.4
  Top w0.12: v1(93.895,47.228) 94,47.333 IC3.7
  Signal 1 w0.12: v1(88.625,58.825) 88.981,58.825 90.949,56.857 90.949,49.001 92.939,47.011 93.66,47.011 93.877,47.228 v1(93.895,47.228)
  Bottom w0.12: v1(88.625,58.825) IC2.8
CS: IC2.16 IC4.19 | length 11
  Top w0.12: IC4.19 90.325,51.856 v1(90.327,51.858)
  Signal 2/GND w0.12: v1(90.327,51.858) 91.7,53.231 v1(91.7,60.677)
  Bottom w0.12: IC2.16 91.265,61.535 91.265,61.112 v1(91.7,60.677)
CS_2: IC2.20 IC3.19 | length 13.2
  Top w0.12: IC3.19 96.55,51.4 96.55,52.15 v1(96.6,52.2)
  Signal 2/GND w0.12: v1(93.248,62.23) 93.273,62.205 93.653,62.205 96.137,59.721 96.137,52.663 v1(96.6,52.2)
  Bottom w0.12: IC2.20 93.224,61.624 93.224,62.206 v1(93.248,62.23)
DIO: IC2.6 IC4.8 | length 11.9
  Top w0.12: IC4.8 88.35,47.425 88.35,46.867 v1(88.374,46.842)
  Signal 1 w0.12: v1(88.374,46.842) 89.062,47.529 89.062,57.624 88.95,57.736 v1(88.95,57.825)
DIO_2: IC2.10 IC3.8 | length 18.2
  Top w0.12: IC3.8 94.552,47.398 94.552,46.825 v1(94.605,46.772)
  Signal 1 w0.12: v1(88.622,59.82) 88.213,59.411 88.213,58.654 88.63,58.237 89.121,58.237 90.739,56.619 90.739,48.914 92.94,46.713 94.546,46.713 v1(94.605,46.772)
  Bottom w0.12: v1(88.622,59.82) 88.627,59.825 IC2.10
ELRS_MISO: IC2.13 IC3.16 IC4.16 | length 22.3
  Top w0.12: IC4.16 91.06,49.685 92.059,49.685 v1(92.094,49.719) ; IC3.16 97.289,49.739 97.853,49.739 v1(97.916,49.802)
  Signal 1 w0.12: v1(89.668,61.752) 89.245,61.752 88.487,60.994 88.487,60.538 91.159,57.866 91.159,50.416 91.793,49.782 92.03,49.782 v1(92.094,49.719)
  Signal 3 w0.12: v1@92.092,49.725 97.75,49.725 97.827,49.802 v1(97.916,49.802)
  Bottom w0.12: v1(89.668,61.752) 89.668,61.682 89.7,61.65 IC2.13
ELRS_MOSI: IC2.12 IC3.17 IC4.17 | length 20
  Top w0.12: IC4.17 91.758,50.15 91.893,50.285 v1(91.983,50.285) ; IC3.17 97.275,50.225 97.694,50.225 97.919,50.45 v1(98,50.45)
  Signal 1 w0.12: v1(88.899,60.823) 91.369,58.353 91.369,50.966 91.983,50.352 v1(91.983,50.285) ; v1@97.94,50.45 v1(98,50.45)
  Signal 3 w0.12: v1(91.983,50.285) 92.372,50.675 97.703,50.675 97.928,50.45 v1@97.94,50.45
Filtered_1: FL1.2 IC5.4 | length 1.8
  Top w0.12: FL1.2 96.891,52.85 ccw(c96.891,53.109) 97.15,53.109 IC5.4
Filtered_2: FL2.2 IC6.4 | length 1.8
  Top w0.12: FL2.2 90.693,52.85 ccw(c90.693,53.132) 90.975,53.132 IC6.4
GND: ANT1.1 C1.1 C2.1 C3.2 C4.1 C5.1 C6.1 C7.1 C8.1 C9.1 C11.1 C14.1 C15.2 C16.2 C17.1 C18.2 C19.2 C20.1 C21.1 C22.1 C23.1 C24.1 C25.1 C26.1 C27.1 D1.3 FL1.1 FL1.3 FL2.1 FL2.3 IC1.3 IC1.7 IC2.49 IC3.5 IC3.13 IC3.20 IC3.21 IC3.23 IC3.24 IC3.25 IC4.5 IC4.13 IC4.20 IC4.21 IC4.23 IC4.24 IC4.25 IC5.1 IC5.2 IC5.3 IC5.7 IC5.8 IC5.9 IC5.11 IC5.12 IC5.15 IC5.17 IC6.1 IC6.2 IC6.3 IC6.7 IC6.8 IC6.9 IC6.11 IC6.12 IC6.15 IC6.17 J1.2 J1.3 J1.4 J2.2 J2.3 J2.4 L1.2 P1.1 S1.2 S1.3 S1.4 X1.2 X1.4 X2.2 X2.4 | length 67.4
  Top w0.2: 86.375,47.95 86.375,48.296 86.679,48.6 87.075,48.6 IC4.5 89.463,48.65 v1(89.488,48.675) 89.988,48.175 91,48.175 IC4.13 ; 86.85,54.2 86.85,55.25 C25.1 86.9,55.55 87.525,55.55 C26.1 88.179,55.725 88.304,55.6 88.675,55.6 IC6.15 IC6.17@90,55.55 ; IC4.24 87.825,50.65 IC4.25 ; IC4.23 88.325,50.625 89.225,49.725 89.35,49.85 v1(89.925,49.85) ; IC4.25@89.325,49.9 IC4.21 ; IC6.1 89.475,55.025 IC6.17@90,55.55 ; IC4.25@89.825,50.05 IC4.20 ; IC6.2 89.975,55.375 IC6.17@90.15,55.55 ; IC6.11 89.975,57.954 89.8,58.129 89.8,58.2 89.625,58.375 C19.2 89.475,58.275 IC6.12 89.475,56.575 89.8,56.25 v1(90.175,56.25) ; IC6.3 90.475,55.325 v1(90.2,55.6) ; IC6.9 90.975,56.575 IC6.17@90.95,56.55 ; IC6.7 90.375,56.05 v1(90.175,56.25) ; IC6.8 IC6.17@90.95,56.55 ; C11.1 93.025,55.85 C24.1 C24.1@93.85,55.8 ; IC3.5 94.5,48.65 IC3.25 ; IC3.24 94,50.65 IC3.25@94.5,50.15 ; C24.1@94.05,55.6 IC5.15@94.85,55.6 ; IC3.23 IC3.25@94.5,50.15 ; IC5.15 IC5.17@96.15,55.55 ; IC3.21 IC3.25@95.5,49.65 ; IC5.1 95.65,55.05 IC5.17@96.15,55.55 ; IC5.12 95.65,56.55 IC5.17@96.15,56.05 ; IC3.20 96,50.15 IC3.25@95.5,49.65 ; IC5.2 IC5.17@96.15,55.55 ; IC5.11 IC5.17@96.15,56.05 ; IC5.3 96.65,55.171 97.479,56 97.85,56 IC5.7 ; IC5.9 IC5.17@97.15,56.55 ; IC3.13 96.5,48.15 IC3.25 ; IC5.8 IC5.17@97.15,56.55 ; IC6.17@90,55.55 90.05,55.6 v1(90.2,55.6) ; IC6.17@90,55.55 IC6.17@90.15,55.55 ; IC6.17@90.15,55.55 v1(90.2,55.6) ; v1(90.175,56.25) 90.475,56.55 IC6.17@90.95,56.55 ; IC3.25@94.5,50.15 IC3.25 ; IC3.25 IC3.25@95.5,49.65 ; IC5.17@96.15,55.55 IC5.17 ; IC5.17@96.15,56.05 IC5.17 ; IC5.17 IC5.17@97.15,56.55
  Top w0.3: IC4.25@89.825,50.05 89.825,49.95 v1(89.925,49.85) ; IC4.20 89.825,52.075 89.9,52.15 FL2.3 89.9,53.575 89.975,53.65 IC6.2 ; IC3.20 96,52.075 96.075,52.15 FL1.3 96.075,53.575 96.15,53.65 IC5.2
  Bottom w0.2: ANT1.1 88.178,59.925 ; C2.1 90.4,47.5 90.6,47.3 91.2,47.3 IC1.7
  other v1: 96.25,43.5 96.25,44 96.25,44.5 94.8,45.3 86.675,45.45 97.925,45.85 93.3,46.175 86.675,46.8 91.4,46.9 97.979,47.55 96.2,48.55 96.2,49.2 94.55,49.3 97.9,51.85 87.575,52.525 97.65,53.4 86.75,53.5 87.475,53.65 88.125,54.025 97.075,55.525 97.075,56.325 92.826,56.602 92.7,57.375 86.525,57.725 87.925,57.775 95.1,58 92.65,58.1 97.975,58.35 95.096,58.496 92.6,58.75 98.375,59.9 92.725,60 95.677,61.302 88.6,62.05 86.975,62.825 88.725,63.175 91.9,63.325 95.075,63.775 93.3,64.075 95.1,64.625 98.275,64.625 97.8,65.125 93.6,65.25 90.544,65.54 96.525,65.55 96.975,65.95 90.575,66.125
NetANT1_4: ANT1.4 L2.2 | length 1.6
  Bottom w0.12: L2.2 ANT1.4
NetC3_1: C3.1 IC2.9 R1.1 | length 12.3
  Signal 3 w0.15: v1(88.925,59.325) 92.8,63.2 v1(94.273,63.2)
  Bottom w0.15: v1(94.273,63.2) 95.073,62.4 R1.1 C3.1
NetC4_2: C4.2 IC3.1 | length 1
  Top w0.12: v1(92.904,51.321) 92.882,51.299 92.882,50.81 92.935,50.757 92.935,50.74 93.025,50.65 IC3.1
NetC5_2: C5.2 C8.2 IC3.2 IC3.12 | length 5.8
  Power w0.2: v1(92.838,50.15) 95.538,47.45 v1(96.502,47.45)
  Bottom w0.12: v1(92.838,50.15) C8.2
  Bottom w0.15: C5.2 96.452,47.5 v1(96.502,47.45)
NetC15_1: C15.1 J1.1 L3.2 | length 2.3
  Top w0.12: L3.2 J1.1
NetC16_1: C16.1 J2.1 L4.2 | length 2.3
  Top w0.12: L4.2 J2.1
NetC17_2: C17.2 IC4.1 | length 1
  Top w0.12: v1(86.875,51.425) 86.875,50.74 86.965,50.65 IC4.1
NetC18_1: C18.1 IC5.10 L3.1 | length 2
  Top w0.12: L3.1 C18.1 ccw(c96.65,58.375) 96.65,58.35 IC5.10
NetC19_1: C19.1 IC6.10 L4.1 | length 2
  Top w0.12: IC6.10 L4.1
NetC20_2: C20.2 C23.2 IC4.2 IC4.12 | length 7.7
  Top w0.15: v1(86.663,50.15) IC4.2 ; IC4.12 v1(90.325,46.725) 90.325,46 C20.2
  Power w0.2: v1(86.663,50.15) 90.04,46.773 90.277,46.773 v1(90.325,46.725)
  Bottom w0.15: v1(86.663,50.15) C23.2
NetD1_4: D1.4 IC2.39 | length 15.1
  Signal 1 w0.12: v1(87.903,64.347) 87.932,64.375 91.975,64.375 94.223,62.127 v1(94.223,54.287)
NetFL1_4: FL1.4 IC3.22 | length 1.9
  Top w0.12: IC3.22 95,52.568 cw(c95.282,52.568) 95.282,52.85 FL1.4
NetFL2_4: FL2.4 IC4.22 | length 1.9
  Top w0.12: IC4.22 88.825,52.569 cw(c89.106,52.569) 89.106,52.85 FL2.4
NetIC2_2: IC2.2 L1.1 L2.1 | length 3
  Bottom w0.12: L1.1 L2.1 ccw(c87.45,56.2) 87.45,55.825 IC2.2
NetIC2_23: IC2.23 R2.1 S1.1 | length 6.4
  Bottom w0.15: R2.1 91.675,64.15 S1.1 92.411,64.3 94.65,62.061 94.65,61.65 IC2.23
NetIC3_4: IC3.4 X1.1 | length 1
  Top w0.12: v1(92.838,49.15) IC3.4
  Bottom w0.12: v1(92.838,49.15) 92.869,49.119 93.331,49.119 X1.1
NetIC3_6: IC3.6 X1.3 | length 3.7
  Top w0.12: IC3.6 93.408,48.15 93.498,48.06 93.352,48.06 v1(93.352,47.423)
  Bottom w0.12: v1(93.352,47.423) 93.415,47.36 93.415,47.125 93.725,46.816 94.066,46.816 94.479,47.229 94.479,47.954 X1.3
NetIC4_4: IC4.4 X2.1 | length 0.8
  Top w0.12: v1(86.425,49.02) 86.488,49.083 87.058,49.083 IC4.4
NetIC4_6: IC4.6 X2.3 | length 2.1
  Top w0.12: IC4.6 87.233,48.15 87.323,48.06 v1(87.323,47.359)
  Bottom w0.12: v1(87.323,47.359) 87.386,47.422 87.572,47.422 88.175,48.025 X2.3
PWM1: IC2.24 P5.1 | length 27.1
  GND Top w0.12: v1(88.25,43.25) 88.625,43.9 v1(88.25,44.75) ; v1@88.62,43.891 88.622,43.891 v1(88.625,43.888)
  Signal 1 w0.12: v1(88.625,43.888) 88.637,43.9 91.817,43.9 93.131,45.214 93.926,45.214 95.7,46.988 95.7,50.717 98.312,53.329 98.312,55.863 95.2,58.975 v1(95.2,61.7)
PWM2: IC2.38 P6.1 | length 13.8
  GND Top w0.12: v1(91.575,44.45) v1(91.6,43.4)
  Signal 1 w0.12: v1(91.575,44.45) 92.741,45.616 94.032,45.616 95.017,46.602 95.017,49.733 94.475,50.275 v1(94.475,52.437)
  Bottom w0.12: v1(94.475,52.437) 94.475,52.527 94.337,52.665 94.337,53.789 94.512,53.965 94.512,53.987 94.7,54.175 IC2.38
PWM3: IC2.42 P7.1 | length 13.4
  GND Top w0.12: v1(94.544,44.519) v1(94.75,43.5)
  Bottom w0.12: IC2.42 92.7,53.735 93.125,53.31 93.125,52.314 93.536,51.903 93.536,51.074 93.992,50.619 94.756,50.619 95.212,50.163 95.212,44.879 P7.1@94.333,44
PWM4: IC2.34 P8.1 | length 14.9
  GND Top w0.12: v1(98,43.5) v1(98,44) v1(98,44.5)
  Bottom w0.12: IC2.34 96.592,56.325 96.662,56.255 96.662,54.828 95.975,54.141 95.975,51.575 97.413,50.137 97.413,44.087 P8.1@97.5,44
PWR_RXEN: IC2.29 IC6.6 | length 13.9
  Top w0.12: IC6.6 91.762,55.513 92.926,55.513 93.388,55.051 93.388,54.539 94.309,53.619 v1(94.749,53.619)
  Signal 3 w0.12: v1(94.749,53.619) 96.417,53.619 96.611,53.425 v1(96.7,53.425)
  Bottom w0.12: IC2.29 96.85,58.825 98.35,57.325 98.35,54.75 97.029,53.429 96.704,53.429 v1(96.7,53.425)
PWR_RXEN2: IC2.28 IC5.6 | length 6.4
  Top w0.12: IC5.6 98.42,55.55 98.49,55.62 98.49,58.585 v1(97.9,59.175)
  Bottom w0.12: IC2.28 97.661,59.325 97.811,59.175 v1(97.9,59.175)
PWR_TXEN: IC2.17 IC6.5 | length 9.7
  Top w0.12: IC6.5 91.975,55.05 92.065,54.96 92.065,53.899 92.201,53.763 v1(92.201,53.698)
  Signal 1 w0.12: v1(91.702,61.498) 92.179,61.021 92.179,53.72 v1(92.201,53.698)
PWR_TXEN2: IC2.21 IC5.5 | length 12.2
  Signal 1 w0.12: v1(93.7,61.575) 93.7,54.227 94.052,53.875 94.422,53.875 94.578,54.031 96.883,54.031 v1(97.9,55.048)
RST: IC2.15 IC3.3 IC4.3 | length 23.5
  Top w0.12: v1(86.425,49.624) 86.438,49.637 87.112,49.637 IC4.3 ; v1(92.217,52.794) 92.24,52.794 92.737,52.297 92.737,51.795 92.4,51.458 92.4,50.005 92.695,49.71 93.24,49.71 IC3.3
  Signal 1 w0.12: v1(91.327,62.452) 91.327,62.369 91.175,62.217 91.175,59.372 91.789,58.758 91.789,53.231 92.217,52.803 v1(92.217,52.794)
  Signal 3 w0.12: v1(86.425,49.624) 89.117,49.624 92.217,52.724 v1(92.217,52.794)
  Bottom w0.12: IC2.15 90.765,61.665 90.765,62.165 90.989,62.389 91.264,62.389 v1(91.327,62.452)
RX: IC2.40 P4.1 | length 16.8
  GND Top w0.12: v1(86.75,43.5) v1(86.65,44.05) v1(86.75,44.5)
  Signal 2/GND w0.12: v1(86.75,44.5) 86.785,44.5 86.985,44.3 88.808,44.3 89.233,43.875 90.033,43.875 90.923,44.765 90.923,49.923 93.711,52.711 v1(93.711,53.633)
  Bottom w0.12: IC2.40 93.706,54.544 93.706,53.639 v1(93.711,53.633)
SCK: IC2.14 IC3.18 IC4.18 | length 20.8
  Top w0.12: IC4.18 91.3,50.65 91.39,50.74 91.39,51.31 92.251,52.171 v1(92.28,52.171) ; IC3.18 v1(97.2,51.275)
  Signal 1 w0.12: v1(89.623,62.452) 90.125,61.95 90.125,60.125 91.579,58.671 91.579,52.832 92.241,52.171 v1(92.28,52.171) ; v1(97.2,51.275) v1@97.2,51.325
  Signal 3 w0.12: v1(92.28,52.171) 92.28,52.131 92.649,51.762 96.763,51.762 v1@97.2,51.325
  Bottom w0.12: v1(89.623,62.452) 89.686,62.389 89.911,62.389 90.135,62.165 90.135,61.665 IC2.14
TX: IC2.41 P3.1 | length 12.5
  GND Top w0.12: v1(89.9,43.4) v1(89.9,44.325)
  Signal 2/GND w0.12: v1(89.9,44.325) 89.9,49.208 93.141,52.449 93.141,53.81 v1(93.174,53.844)
  Bottom w0.12: v1(93.174,53.844) 93.187,53.857 93.187,54.537 IC2.41
pads on no net: ANT1.2 ANT1.6 D1.1 IC1.2 IC1.5 IC2.7 IC2.11 IC2.18 IC2.22 IC2.25 IC2.26 IC2.27 IC2.30 IC2.31 IC2.32 IC2.33 IC2.35 IC2.36 IC2.43 IC2.44 IC2.45 IC2.47 IC2.48 IC3.9 IC3.10 IC3.14 IC4.9 IC4.10 IC4.14 IC5.13 IC6.13 S1.

## Polygon pours and split planes (outlines as drawn)
GND on Top "GND_L01_P000" (solid, pour order 0): 86,44.02 86,65.33 cw(c87.27,65.33) 87.27,66.6 97.7,66.6 cw(c97.7,65.33) 98.97,65.33 98.97,44.02 cw(c97.7,44.02) 97.7,42.75 87.27,42.75 cw(c87.27,44.02)
GND on GND Top "GND_L02_P001" (solid, pour order 1): 86,44.02 86,65.33 cw(c87.27,65.33) 87.27,66.6 97.7,66.6 cw(c97.7,65.33) 98.97,65.33 98.97,44.02 cw(c97.7,44.02) 97.7,42.75 87.27,42.75 cw(c87.27,44.02)
GND on Signal 1 "GND_L03_P002" (solid, pour order 2): 86,44.02 86,65.33 cw(c87.27,65.33) 87.27,66.6 97.7,66.6 cw(c97.7,65.33) 98.97,65.33 98.97,44.02 cw(c97.7,44.02) 97.7,42.75 87.27,42.75 cw(c87.27,44.02)
3V3 on Power "3V3_L05_P004" (solid, pour order 4): 86,44.02 86,65.33 cw(c87.27,65.33) 87.27,66.6 97.7,66.6 cw(c97.7,65.33) 98.97,65.33 98.97,44.02 cw(c97.7,44.02) 97.7,42.75 87.27,42.75 cw(c87.27,44.02)
GND on Signal 3 "GND_L06_P005" (solid, pour order 5): 86,44.02 86,65.33 cw(c87.27,65.33) 87.27,66.6 97.7,66.6 cw(c97.7,65.33) 98.97,65.33 98.97,44.02 cw(c97.7,44.02) 97.7,42.75 87.27,42.75 cw(c87.27,44.02)
GND on GND Bottom "GND_L07_P006" (solid, pour order 6): 86,44.02 86,65.33 cw(c87.27,65.33) 87.27,66.6 97.7,66.6 cw(c97.7,65.33) 98.97,65.33 98.97,44.02 cw(c97.7,44.02) 97.7,42.75 87.27,42.75 cw(c87.27,44.02)
3V3 on Bottom "3V3_L08_P007" (solid, pour order 7): 90.725,49.525 90.35,49.15 90.35,47.55 90.6,47.3 91.025,47.3 92.531,48.806 92.531,49.356 92.362,49.525 90.75,49.525
GND on Bottom "GND_L08_P009" (solid, pour order 9): 86,44.02 86,65.33 cw(c87.27,65.33) 87.27,66.6 97.7,66.6 cw(c97.7,65.33) 98.97,65.33 98.97,44.02 cw(c97.7,44.02) 97.7,42.75 87.27,42.75 cw(c87.27,44.02)
GND on Signal 2/GND "GND_L04_P003" (solid, pour order 3): 86,44.02 86,65.33 cw(c87.27,65.33) 87.27,66.6 97.7,66.6 cw(c97.7,65.33) 98.97,65.33 98.97,44.02 cw(c97.7,44.02) 97.7,42.75 87.27,42.75 cw(c87.27,44.02)

## Other copper
Multi-Layer:
  pour cut-out: 86,62.35 88.1,62.35 88.1,58.075 86,58.075

## Silkscreen, mask and mechanical layers (free items; w line width, h text height)
Top Overlay:
  text "5V" at 94.3,44.925 h1 r270
  text "RX" at 88,44.9 h1 r270
  text "TX" at 91.2,44.9 h1 r270
  text "G" at 97.5,44.9 h0.9 r270
Bottom Overlay:
  text "P1" at 87.4,45.125 h0.88 r90
  text "P2" at 90.5,44.9 h1 r90
  text "P3" at 93.6,44.9 h1 r90
  text "P4" at 96.8,44.9 h1 r90
Board Shape:
  lines w0.15: 86,44.02 ccw(c87.27,44.02) 87.27,42.75 90.5,42.75 97.7,42.75 ccw(c97.7,44.02) 98.97,44.02 98.97,46.5 98.97,65.23 98.97,65.33 ccw(c97.7,65.33) 97.7,66.6 87.7,66.6 87.27,66.6 ccw(c87.27,65.33) 86,65.33 86,65.23 86,64.5 86,44.02